# Altium PCB PCB2.PcbDoc
Units mil, origin at the board's own origin, x right, y up, seen from the top; angles counter-clockwise.
Board outline 2150 x 2100 mil, 2 copper layers (Top Layer, Bottom Layer), stack 61.8 mil thick; 27 components, 47 nets, 103 pads, 22 vias.
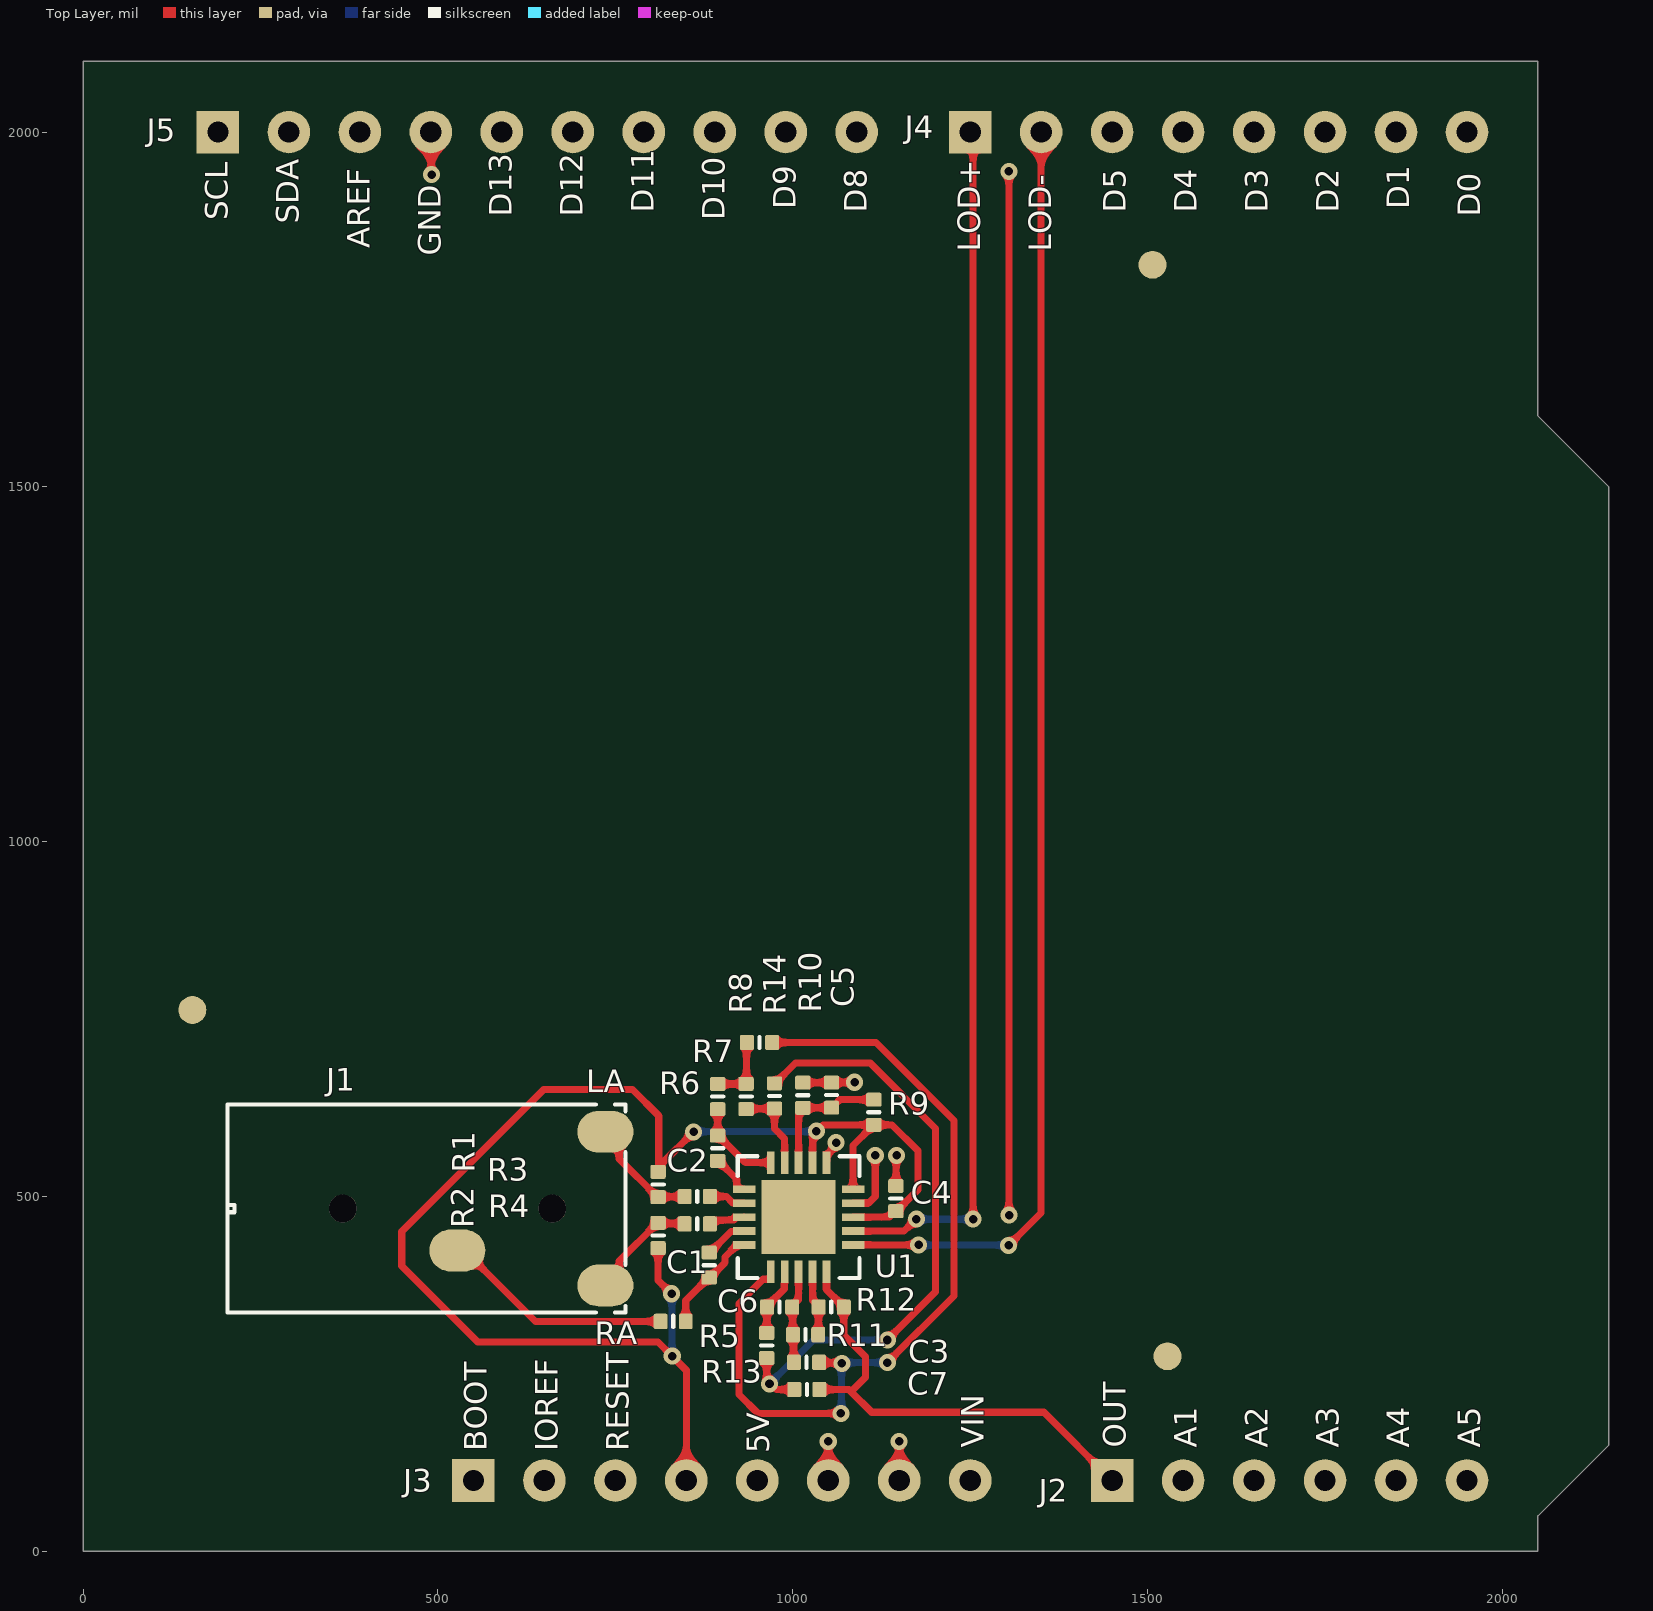
[diagram p0: Top Layer view]
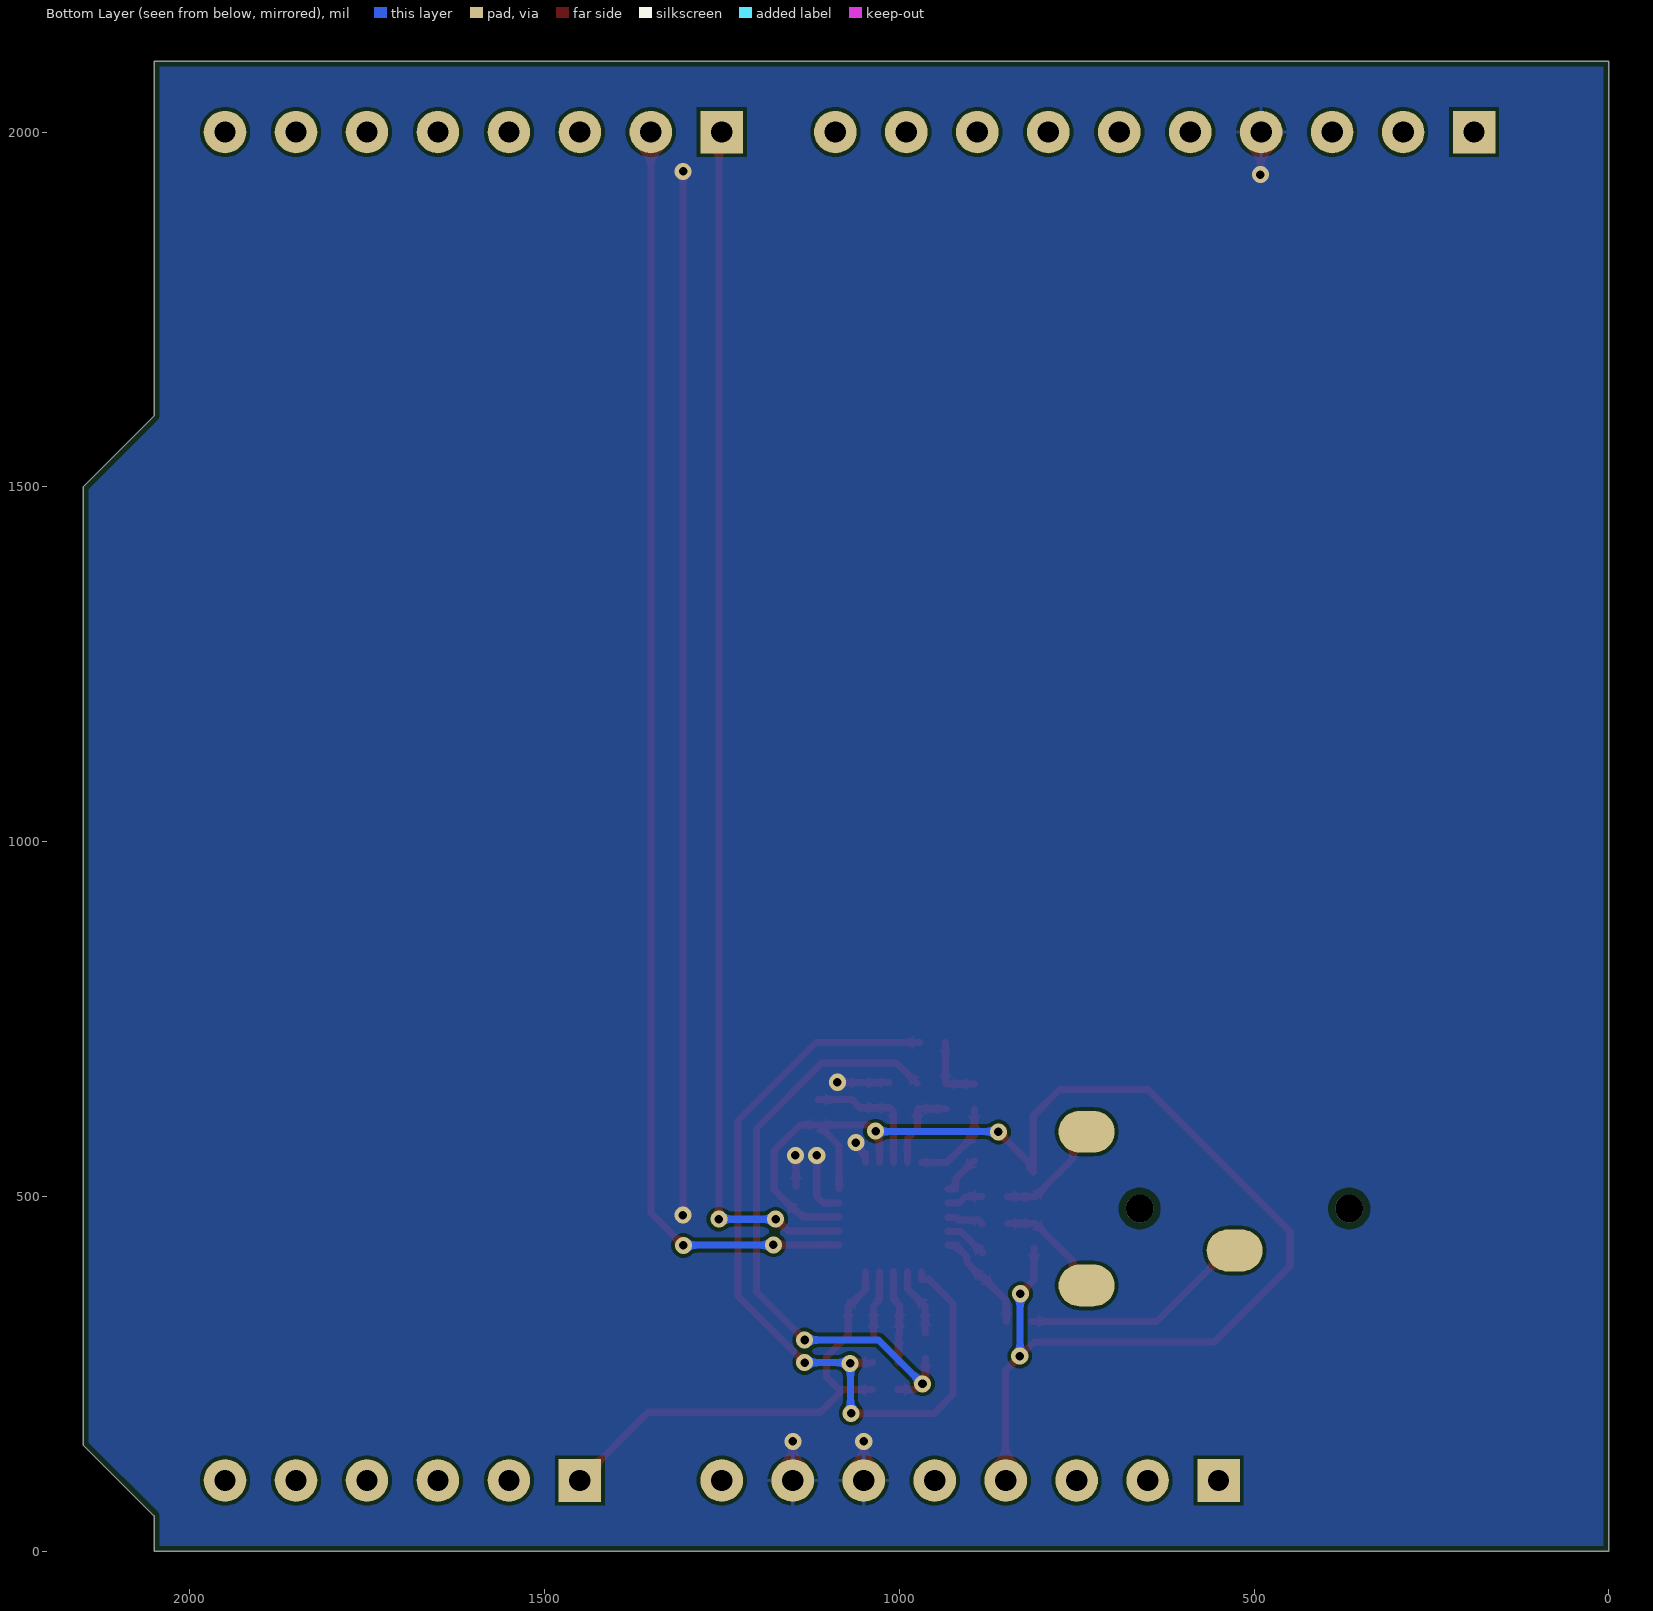
[diagram p1: Bottom Layer view, seen from below]
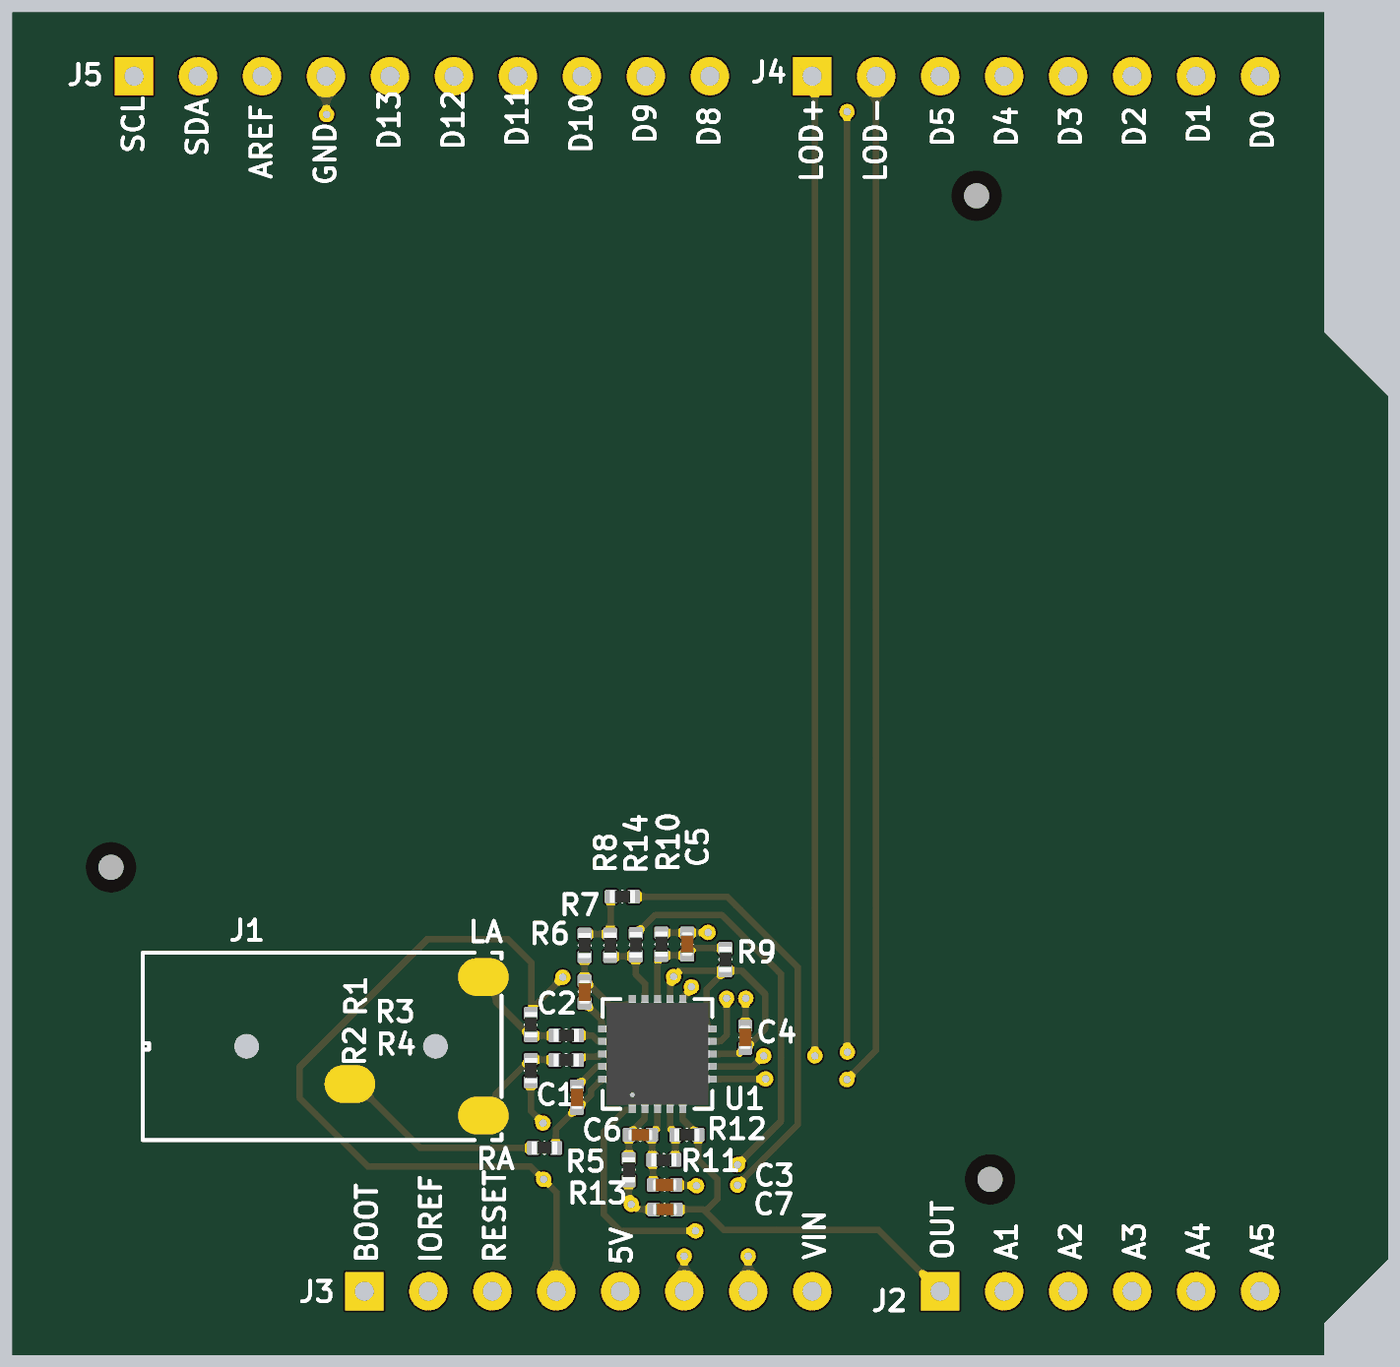
[diagram p2: 3D render of the assembled board from above, using the file's embedded part models]

## Layer stack, top to bottom
Top Solder: solder mask 0.4, Solder Resist, Dk 3.5
Top Layer: signal copper 1.4
Dielectric 1: dielectric 59, FR-4, Dk 4.8
Bottom Layer: signal copper 1.4
Bottom Solder: solder mask 0.4, Solder Resist, Dk 3.5

## Board outline
0,0 0,2100 2050,2100 2050,1600 2150,1500 2150,150 2050,50 2050,0

## Design rules (kind name [scope] priority, off if disabled: settings)
BoardOutlineClearance [All] p1: gap=7.87 ignorepadtopadclearanceinfootprint=FALSE
Clearance [All] p1: gap=5 ignorepadtopadclearanceinfootprint=FALSE except(9.84: Arc-Hole Track-Hole SMDPad-Hole THPad-Hole Via-Hole Fill-Hole Poly-Hole Region-Hole Text-Hole)
ComponentClearance [All] p1: gap=5 collisioncheckmode=3 verticalgap=5 showdistances=TRUE
DiffPairsRouting [All] p1: maxlimit=10 minlimit=5 mostfreqgap=5 toplayer_minwidth=5 toplayer_maxwidth=1000 toplayer_prefwidth=5 bottomlayer_minwidth=5 bottomlayer_maxwidth=1000 bottomlayer_prefwidth=5 maxuncoupledlength=500
Height [All] p1: minheight=0 maxheight=71497.94 prefheight=500
HoleSize [All] p1: absolutevalues=TRUE maxlimit=248.03 minlimit=11.81 maxpercent=80.000 minpercent=20.000
HoleToHoleClearance [All] p1: gap=9.84 allowstackedmicrovias=FALSE
MinimumAnnularRing [All] p1: minimumring=3
MinimumSolderMaskSliver [All] p1: minsoldermaskwidth=0
PlaneClearance [All] p1: clearance=5
PlaneConnect PlaneConnectPowerPads [InPadClass('PowerPads')] p1: planeconnectstyle=Direct reliefexpansion=20 reliefentries=4 reliefconductorwidth=10 reliefairgap=10
PlaneConnect [All] p2: pad.planeconnectstyle=Relief pad.reliefexpansion=11.81 pad.reliefentries=4 pad.reliefconductorwidth=5 pad.reliefairgap=5 via.planeconnectstyle=Direct via.reliefexpansion=11.81 via.reliefentries=4 via.reliefconductorwidth=5 via.reliefairgap=5
PolygonConnect PolygonConnectPowerPads [All vs (InPadClass('PowerPads'))] p1: connectstyle=Direct reliefconductorwidth=10 reliefentries=4 polygonreliefangle="90 Angle" airgapwidth=10
PolygonConnect [All] p2: thpad.connectstyle=Relief thpad.reliefconductorwidth=5 thpad.reliefentries=4 thpad.polygonreliefangle="90 Angle" thpad.airgapwidth=5 smdpad.connectstyle=Relief smdpad.reliefconductorwidth=5 smdpad.reliefentries=4 smdpad.polygonreliefangle="90 Angle" smdpad.airgapwidth=5 via.connectstyle=Direct via.reliefconductorwidth=5 via.reliefentries=4 via.polygonreliefangle="90 Angle" via.airgapwidth=5
RoutingVias [All] p1: holewidth=11.81 width=23.62 viastyle="Through Hole" minholewidth=11.81 minwidth=23.62 maxholewidth=23.62 maxwidth=259.84
SilkToSilkClearance [All] p1: silktosilkclearance=6
SolderMaskExpansion [All] p1: expansion=2.95 istentingtop=FALSE
SupplyNets "Schematic Supply Nets" [InNet('GND')] p1: voltage=0.000
Width [All] p1: maxlimit=1000 minlimit=5 preferedwidth=5 minimp=50.000000 maximp=50.000000 favimp=50.000000
21 further rules are at their usual default settings.

## Components (designator, comment, footprint, x,y, rotation, side; value= is the part's Value field where it differs from the comment)
C1 "Capacitor 1nF +/-20% 50V 0402" CAPC0402(1005)33_L 882.18,403.38 r90 top value=1nF
C2 "Capacitor 1nF +/-20% 50V 0402" CAPC0402(1005)33_L 894.2,568.1 r90 top value=.33μF
C3 "Capacitor 1nF +/-20% 50V 0402" CAPC0402(1005)33_L 1019.42,266.47 r180 top value=.33μF
C4 "Capacitor 1nF +/-20% 50V 0402" CAPC0402(1005)33_L 1145.2,497.1 r90 top value=.1μF
C5 "Capacitor 1nF +/-20% 50V 0402" CAPC0402(1005)33_L 1054.55,642.96 r90 top value=.1μF
C6 "Capacitor 1nF +/-20% 50V 0402" CAPC0402(1005)33_L 981.42,344.47 r180 top value=10nF
C7 "Capacitor 1nF +/-20% 50V 0402" CAPC0402(1005)33_L 1019.91,228.1 r0 top value=1.5nF
J1 "STX-3000" STX-3000_KYC 527.34,424.04 r90 top
J2 "6 Pin Header" "6 Pin Header-Footprint-1" 1750,100 r0 top
J3 "8 Pin Header" "8 Pin Header-Footprint-1" 850,100 r0 top
J4 "8 Pin Header" "8 Pin Header-Footprint-1" 1550,2000 r0 top
J5 "10 Pin Header" "10 Pin Header-Footprint-1" 590,2000 r0 top
R1 "VISHAY CRCW040210M0FKED" RESC0402(1005)_L 810.2,517.1 r90 top value=10MΩ
R2 "VISHAY CRCW040210M0FKED" RESC0402(1005)_L 810.2,445.1 r270 top value=10MΩ
R3 "" RESC0402(1005)_L 865.48,500.1 r180 top value=180kΩ
R4 "" RESC0402(1005)_L 865.42,461.47 r180 top value=180kΩ
R5 "YAGEO RC0402FR-07360KL" RESC0402(1005)_L 831.48,324.1 r180 top value=360kΩ
R6 "VISHAY CRCW040210M0FKED" RESC0402(1005)_L 894.2,640.81 r90 top value=10MΩ
R7 "YAGEO RC0402FR-071M4L" RESC0402(1005)_L 953.2,717.1 r0 top value=1.4MΩ
R8 "VISHAY CRCW040210M0FKED" RESC0402(1005)_L 934.2,641.1 r90 top value=10MΩ
R9 "VISHAY CRCW040210M0FKED" RESC0402(1005)_L 1114.2,618.81 r90 top value=10MΩ
R10 "VISHAY CRCW040210M0FKED" RESC0402(1005)_L 1014.2,642.81 r270 top value=10MΩ
R11 "YAGEO RC0402FR-07100KL" RESC0402(1005)_L 1018.14,305.47 r180 top value=100kΩ
R12 "YAGEO RC0402FR-071ML" RESC0402(1005)_L 1054.14,344.47 r180 top value=1MΩ
R13 "YAGEO RC0402FR-071ML" RESC0402(1005)_L 963.2,290.1 r270 top value=1MΩ
R14 "YAGEO RC0402FR-071ML" RESC0402(1005)_L 974.2,641.81 r90 top value=1MΩ
U1 "AD8232ACPZ-WP" CP_20_10_ADI 1008.2,471.1 r90 top

## Footprints (in the part's own frame and the unit in brackets; to place one, negate y for a bottom-side part, rotate by r counter-clockwise, add the part's x,y. Pads: shape width x height; smd on the part's side, far side on the other; paste and mask are expansions set on the pad)
"6 Pin Header-Footprint-1" [mil]
  rect 60x60 hole 30: 1(-300,0)
  round 60 hole 30: 2(-200,0) 3(-100,0) 4(0,0) 5(100,0) 6(200,0)
"8 Pin Header-Footprint-1" [mil]
  rect 60x60 hole 30: 1(-300,0)
  round 60 hole 30: 2(-200,0) 3(-100,0) 4(0,0) 5(100,0) 6(200,0) 7(300,0) 8(400,0)
"10 Pin Header-Footprint-1" [mil]
  rect 60x60 hole 30: 1(-400,0)
  round 60 hole 30: 2(-300,0) 3(-200,0) 4(-100,0) 5(0,0) 6(100,0) 7(200,0) 8(300,0) 9(400,0) 10(500,0)
CAPC0402(1005)33_L [mm] "Chip Capacitor, Body 1.0x0.5mm, Height 0.33mm, IPC High Density"
  rrect25% 0.5x0.55 smd: 1(-0.45,0) 2(0.45,0)
  silkscreen extent 0,-0.2 0,0.2, body extent -0.5,-0.25 0.5,0.25, height 0.55
CP_20_10_ADI [mm]
  rect 0.275x0.8 smd paste+0 mask+0: 1(1,1.95) 2(0.5,1.95) 3(0,1.95) 4(-0.5,1.95) 5(-1,1.95) 11(-1,-1.95) 12(-0.5,-1.95) 13(0,-1.95) 14(0.5,-1.95) 15(1,-1.95)
  rect 0.8x0.275 smd paste+0 mask+0: 6(-1.95,1) 7(-1.95,0.5) 8(-1.95,0) 9(-1.95,-0.5) 10(-1.95,-1) 16(1.95,-1) 17(1.95,-0.5) 18(1.95,0) 19(1.95,0.5) 20(1.95,1)
  rect 2.65x2.65 smd paste+0 mask+0: HTAB(0,0)
  silkscreen extent -2.18,-2.18 2.18,2.18, body extent -2.05,-2.05 2.05,2.05, height 0.6
RESC0402(1005)_L [mm] "Chip Resistor, Body 1.0x0.5mm, IPC High Density"
  rrect25% 0.5x0.55 smd: 1(-0.45,0) 2(0.45,0)
  silkscreen extent 0,-0.2 0,0.2, body extent -0.5,-0.25 0.5,0.25, height 0.3
STX-3000_KYC [mil]
  oval 59x79 / inner round 60 / far side oval 59x79 all layers, no hole paste-99999 mask+0: 1(0,0) 2(167.33,-208.66) 3(-49.21,-208.66)
  round 39 / inner round 60 / far side round 39 hole 39 unplated paste-99999 mask+0: 4(59.06,161.42) 5(59.06,-133.86)
  silkscreen extent -87,-237 206,324

## Part data
C1 C2 C3 C4 C5 C6 C7: library part CMP-001-00066-3, "Chip Capacitor, 1nF +/-20%, 50V, 0402, Thickness 0.33 mm", Case/Package=0402, Max Operating Temperature=85°C, Min Operating Temperature=-55°C, Tolerance=10%, Voltage Rating=50V, Mounting Technology=SMT, Pins=2
J1: "3.50mm (0.141\", 1/8\", Mini Plug) - Headphone Phone Jack Stereo (3 Conductor, TRS) Connector Kinked Pin", Manufacturer_Name="KYCON, INC.", Copyright="Copyright (C) 2025 Ultra Librarian. All rights reserved.", Manufacturer_Part_Number=STX-3000, RefDes=RefDes, Type=Type
J2: library part CMP-002-00075-2, "1x6 Header"
J3 J4: library part CMP-002-00076-2, "1x8 Header"
J5: library part CMP-002-00077-2, "1x10 Header"
R1 R2 R6 R8 R9 R10: library part CMP-009-00169-3, "RES 10MΩ ±1% 62.5mW 0402", Case/Package=0402, Max Operating Temperature=155°C, Min Operating Temperature=-55°C, Power=63mW, Tolerance=1%, Pins=2
R3 R4: library part CMP-009-00169-3, "RES 180kΩ ±1% 62.5mW 0402", Case/Package=0402, Max Operating Temperature=155°C, Min Operating Temperature=-55°C, Power=63mW, Tolerance=1%, Pins=2
R5: library part CMP-009-00169-3, "RES 360kΩ ±1% 62.5mW 0402", Case/Package=0402, Max Operating Temperature=155°C, Min Operating Temperature=-55°C, Power=63mW, Tolerance=1%, Pins=2
R7: library part CMP-009-00169-3, "RES 1.4MΩ ±1% 62.5mW 0402", Case/Package=0402, Max Operating Temperature=155°C, Min Operating Temperature=-55°C, Power=63mW, Tolerance=1%, Pins=2
R11: library part CMP-009-00169-3, "RES 100kΩ ±1% 62.5mW 0402", Case/Package=0402, Max Operating Temperature=155°C, Min Operating Temperature=-55°C, Power=63mW, Tolerance=1%, Pins=2
R12 R13 R14: library part CMP-009-00169-3, "RES 1MΩ ±1% 62.5mW 0402", Case/Package=0402, Max Operating Temperature=155°C, Min Operating Temperature=-55°C, Power=63mW, Tolerance=1%, Pins=2
U1: "Single-Lead, Heart Rate Monitor Front End", Manufacturer_Name="Analog Devices Inc", Copyright="Copyright (C) 2025 Ultra Librarian. All rights reserved.", Manufacturer_Part_Number=AD8232ACPZ-WP, RefDes=RefDes, Type=Type

## Free pads (board coordinates)
  round 39.37 smd mask-99999: 1(154,763) 1(1507,1813) 1(1528,275)

## Via types
v1: diameter 24, hole 12, Top Layer to Bottom Layer, 22 vias

## Nets (pads, with @x,y where several pads share a name; then routed paths per layer and width w, separated by ;. In a path a pad name is that pad's centre, name@x,y a point inside that pad or via, vN(x,y) a via of type N, cw(c..) or ccw(c..) an arc to the next point about the centre after c; other vN are vias at no path point)
5V: J3.5
A1: J2.2
A2: J2.3
A3: J2.4
A4: J2.5
A5: J2.6
AREF: J5.3
BOOT: J3.1
D0: J4.8
D1: J4.7
D2: J4.6
D3: J4.5
D4: J4.4
D5: J4.3
D8: J5.10
D9: J5.9
D10: J5.8
D11: J5.7
D12: J5.6
D13: J5.5
GND: C4.2 C5.2 J3.6 J3.7 J5.4 R10.1 U1.14 U1.16 | length 1885
  Top Layer w10: J5.4 490.5,1999.5 490.5,1940.5 v1(491,1940) ; R10.1 1014.27,660.6 1054.48,660.6 1054.76,660.89 1086.98,660.89 v1(1087.2,661.1) ; U1.16 1047.57,558.2 1059.67,570.3 1059.67,574.57 v1(1061.2,576.1) ; J3.6 v1(1050,155) ; U1.14 1085.2,491.01 1107.11,491.01 1116.2,500.1 v1(1116.2,558.1) ; C4.2 1145.7,515.31 1145.7,557.6 v1(1146.2,558.1) ; J3.7 v1(1150,155) ; v1(1304.5,1944.5) 1304.5,474.5 v1(1305,474)
HPDRIVE: C2.1 U1.1 | length 62
  Top Layer w10: C2.1 895.18,550.38 920.68,524.89 920.68,510.88 921.09,510.47 U1.1
HPSENSE: C2.2 R6.1 U1.20 | length 126.6
  Top Layer w10: C2.2 R6.1 ; C2.2@895.18,585.81 933.13,547.87 U1.20
IAOUT: R8.1 R14.1 U1.19 | length 122.5
  Top Layer w10: R8.1 934.55,623.74 973.84,623.74 R14.1 974.2,595.89 988.51,581.57 U1.19
IN+: R3.1 U1.2 | length 52.1
  Top Layer w10: R3.1 906.49,500.1 915.39,491.2 931.01,491.2 U1.2
IN-: R4.1 U1.3 | length 52.6
  Top Layer w10: R4.1 883.14,461.98 887.98,466.83 916.82,466.83 920.68,470.69 931.01,470.69 U1.3
IOREF: J3.2
LA: J1.2 R1.1 R3.2 | length 161.2
  Top Layer w10: J1.2 755.38,571.99 755.38,553.22 809.21,499.38 R1.1 810.55,499.74 847.41,499.74 R3.2
LOD+: J4.1 U1.12 | length 1709.8
  Top Layer w10: U1.12 1156.94,451.41 1173.63,468.1 v1(1174.2,468.1) ; J4.1 1254.2,1995.8 v1(1254.2,468.1)
  Bottom Layer w10: v1(1174.2,468.1) v1(1254.2,468.1)
LOD-: J4.2 U1.11 | length 1807.7
  Top Layer w10: U1.11 1085.15,431.91 1177.01,431.91 v1(1177.2,432.1) ; v1(1304.2,431.1) 1350,476.9 J4.2
  Bottom Layer w10: v1(1177.2,432.1) 1177.7,431.6 1303.7,431.6 v1(1304.2,431.1)
NetC7_1: C7.1 R13.2 R14.2 | length 871.1
  Top Layer w10: R13.2 963.2,242.26 967.2,238.26 v1(967.2,236.1) 969.35,236.1 977.35,228.1 C7.1 ; R14.2 975.18,659.53 1003.75,688.1 1109.2,688.1 1201.2,596.1 1201.2,365.93 v1(1133.2,297.93)
  Bottom Layer w10: v1(967.2,236.1) 1029.03,297.93 v1(1133.2,297.93)
NetR6_2: R6.2 R7.1 R8.2 | length 99.4
  Top Layer w10: R6.2@893.84,658.89 R6.2 894.34,658.67 934.05,658.67 R8.2 934.84,659.46 934.84,716.46 R7.1
OPAMP+: C6.2 R13.1 U1.7 | length 96
  Top Layer w10: R13.1 963.45,308.07 963.45,344.21 C6.2 ; C6.2@963.71,345.45 988.1,369.84 988.1,393.91 U1.7
OPAMP-: R11.1 R12.2 U1.9 | length 91.6
  Top Layer w10: U1.9 1027.88,354 R12.2@1036.42,345.45 ; R11.1 1036.14,305.75 1036.14,344.19 R12.2
OUT: C7.2 J2.1 R12.1 U1.10 | length 665.2
  Top Layer w10: C7.2 1079.2,228.1 1082.2,225.1 ; U1.10 1047.57,368.76 1066.03,350.3 1067.02,350.3 R12.1@1071.86,345.45 ; R12.1 1071.86,305.14 1102.2,274.8 1102.2,245.1 1082.2,225.1 ; J2.1 1353.9,196.1 1111.2,196.1 1082.2,225.1
RA: J1.3 R2.1 R4.2 | length 157.4
  Top Layer w10: J1.3 755.38,394.21 755.38,408.98 809.21,462.81 R2.1 810.87,462.14 847.04,462.14 R4.2
REFIN: C5.1 R9.2 R10.2 U1.18 | length 184.9
  Top Layer w10: U1.18 1008.2,620.08 1013.21,625.1 R10.2 1014.34,625.24 C5.1@1054.05,625.24 ; C5.1 1055.53,625.24 1060.37,630.08 1060.37,630.67 1066.23,636.53 R9.2
REFOUT: C3.2 C6.1 R11.2 U1.8 | length 131.7
  Top Layer w10: C6.1 999.78,343.83 999.78,306.11 R11.2 1001.07,304.83 1001.07,267.11 C3.2 ; C6.1@999.14,345.45 1008.2,354.51 U1.8
RESET: J3.3
RL: J1.1 R5.2 | length 327.8
  Top Layer w10: J1.1 537.34,424.04 637.28,324.1 R5.2
RLD: C1.1 R5.1 U1.5 | length 148.9
  Top Layer w10: R5.1 849.2,353.67 C1.1@881.2,385.67 ; C1.1@880.21,385.67 C1.1 ; C1.1@883.16,385.67 904.34,406.84 904.34,414.98 921.09,431.73 U1.5
RLDFB: C1.2 U1.4 | length 61.8
  Top Layer w10: C1.2 883.16,421.1 913.07,451 931.01,451 U1.4
SCL: J5.1
SDA: J5.2
SW: C3.1 R7.2 U1.6 | length 1202.3
  Top Layer w10: U1.6 968.83,383.99 968.41,383.58 958.08,383.58 924,349.5 924,221.29 950.7,194.6 v1(1067.7,194.6) ; R7.2 1117.2,717.1 1227.2,607.1 1227.2,360.1 v1(1133.2,266.1) ; C3.1 1037.83,265.78 1068.51,265.78 v1(1069.2,265.1)
  Bottom Layer w10: v1(1067.7,194.6) 1068.7,195.6 1068.7,264.6 1070.2,266.1 v1(1133.2,266.1)
V_IN: J3.8
V_S: C4.1 J3.4 R1.2 R2.2 R9.1 U1.13 U1.15 U1.17 | length 2084.4
  Top Layer w10: R2.2 810.2,382.1 v1(829.2,363.1) ; J3.4 850,255.29 v1(830.2,275.1) 810.29,295 556,295 449,402 449,451 649,651 774,651 811.18,613.82 811.18,546.93 811.18,539.66 811.18,534.81 816.02,539.66 816.02,546.93 v1(860.2,591.1) ; U1.17 1027.88,584.45 1033.36,589.93 v1(1033.36,592.1) 1042.36,601.1 R9.1@1108.37,601.1 ; U1.13 1135.93,471.1 1144.21,479.38 C4.1 1146.18,479.38 1176.2,509.4 1176.2,564.93 1140.02,601.1 1113.21,601.1 1108.37,596.26 1108.37,595.27 1084.97,571.87 U1.15
  Bottom Layer w10: v1(829.2,363.1) 829.7,362.6 829.7,275.6 v1(830.2,275.1) ; v1(860.2,591.1) 860.7,591.6 1032.86,591.6 v1(1033.36,592.1)
pads on no net: J1.4 J1.5 U1.HTAB

## Polygon pours and split planes (outlines as drawn)
GND on Bottom Layer "GND_L02_P000" (solid, pour order 0): -96.77,2310 2357,2310 2357,307 1800,-250 -230.08,-250 -471.13,2775.91

## Silkscreen, mask and mechanical layers (free items; w line width, h text height)
Top Overlay:
  text "D9" at 1004,1891 h32 r90
  text "D1" at 1869,1891 h32 r90
  text "D11" at 804,1886 h32 r90
  text "D8" at 1104,1886 h32 r90
  text "D5" at 1469,1886 h32 r90
  text "D4" at 1569,1886 h32 r90
  text "D3" at 1669,1886 h32 r90
  text "D2" at 1769,1886 h32 r90
  text "D13" at 604,1881 h32 r90
  text "D12" at 704,1881 h32 r90
  text "D0" at 1969,1881 h32 r90
  text "SCL" at 204,1876 h32 r90
  text "D10" at 904,1876 h32 r90
  text "SDA" at 304,1871 h32 r90
  text "AREF" at 404,1836 h32 r90
  text "LOD+" at 1264,1831 h32 r90
  text "LOD-" at 1364,1831 h32 r90
  text "GND" at 504,1826 h32 r90
  text "LA" at 709,647 h32
  text "RA" at 721,292 h32
  text "VIN" at 1269,146 h32 r90
  text "OUT" at 1469,146 h32 r90
  text "A1" at 1569,146 h32 r90
  text "A2" at 1669,146 h32 r90
  text "A3" at 1769,146 h32 r90
  text "A4" at 1869,146 h32 r90
  text "A5" at 1969,146 h32 r90
  text "BOOT" at 569,141 h32 r90
  text "IOREF" at 669,141 h32 r90
  text "RESET" at 769,141 h32 r90
  text "5V" at 967,138 h32 r90
Top Solder:
  circle w39.37: c1528,275 r19.68
  circle w39.37: c1507,1813 r19.68
  circle w39.37: c154,763 r19.68

## Text inside footprints (layer, text, board x,y; h text height)
J1: Top Assembly "RefDes2" at 567.34,364.04 h32 r90
U1: Top Assembly "*" at 975.33,398.08 h32 r90